# Altium PCB KC_Input_VAS_SP.PcbDoc
Units mil, origin at the board's own origin, x right, y up, seen from the top; angles counter-clockwise.
Board outline 4950 x 1900 mil, 2 copper layers (Top Layer, Bottom Layer); 71 components, 49 nets, 157 pads, 0 vias.
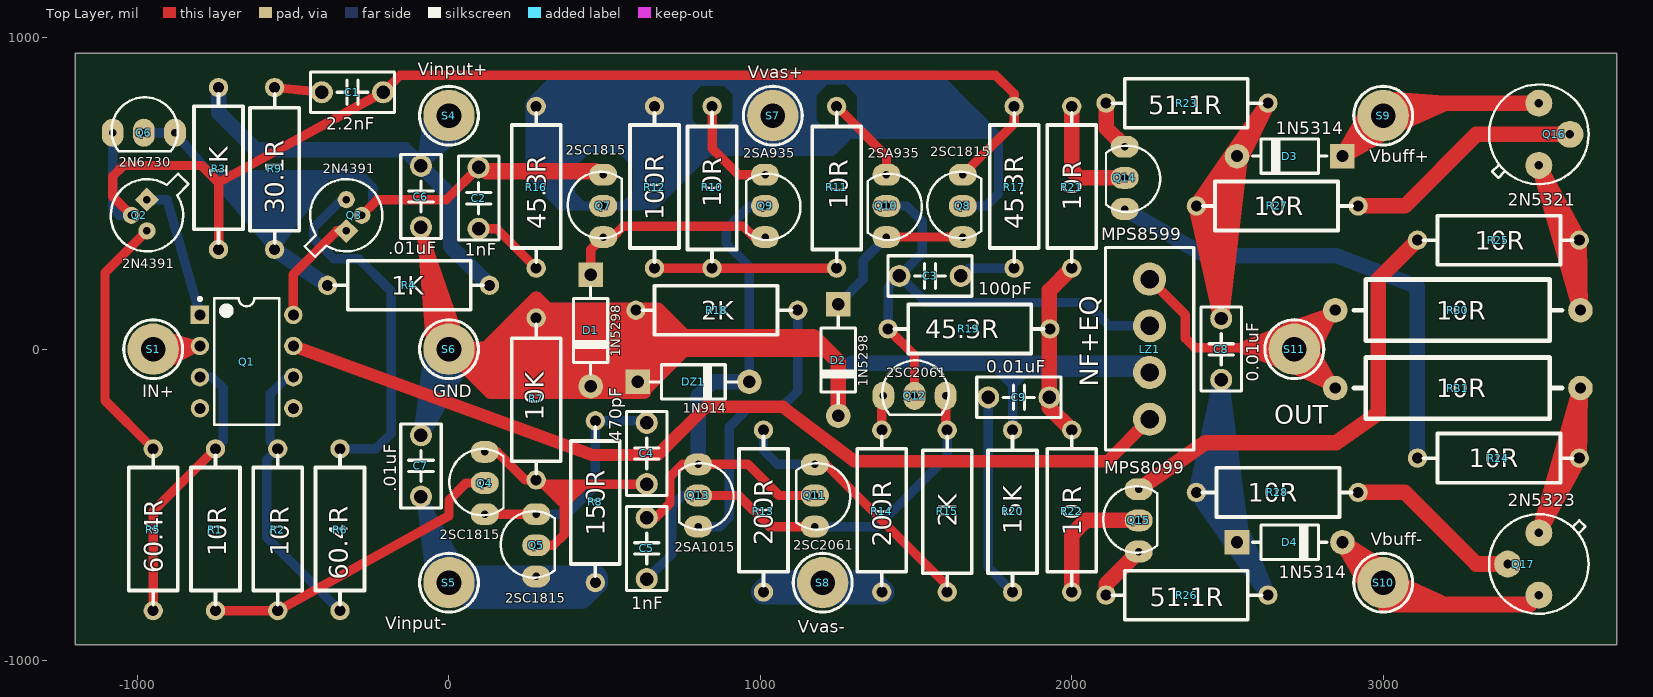
[diagram p0: Top Layer view]
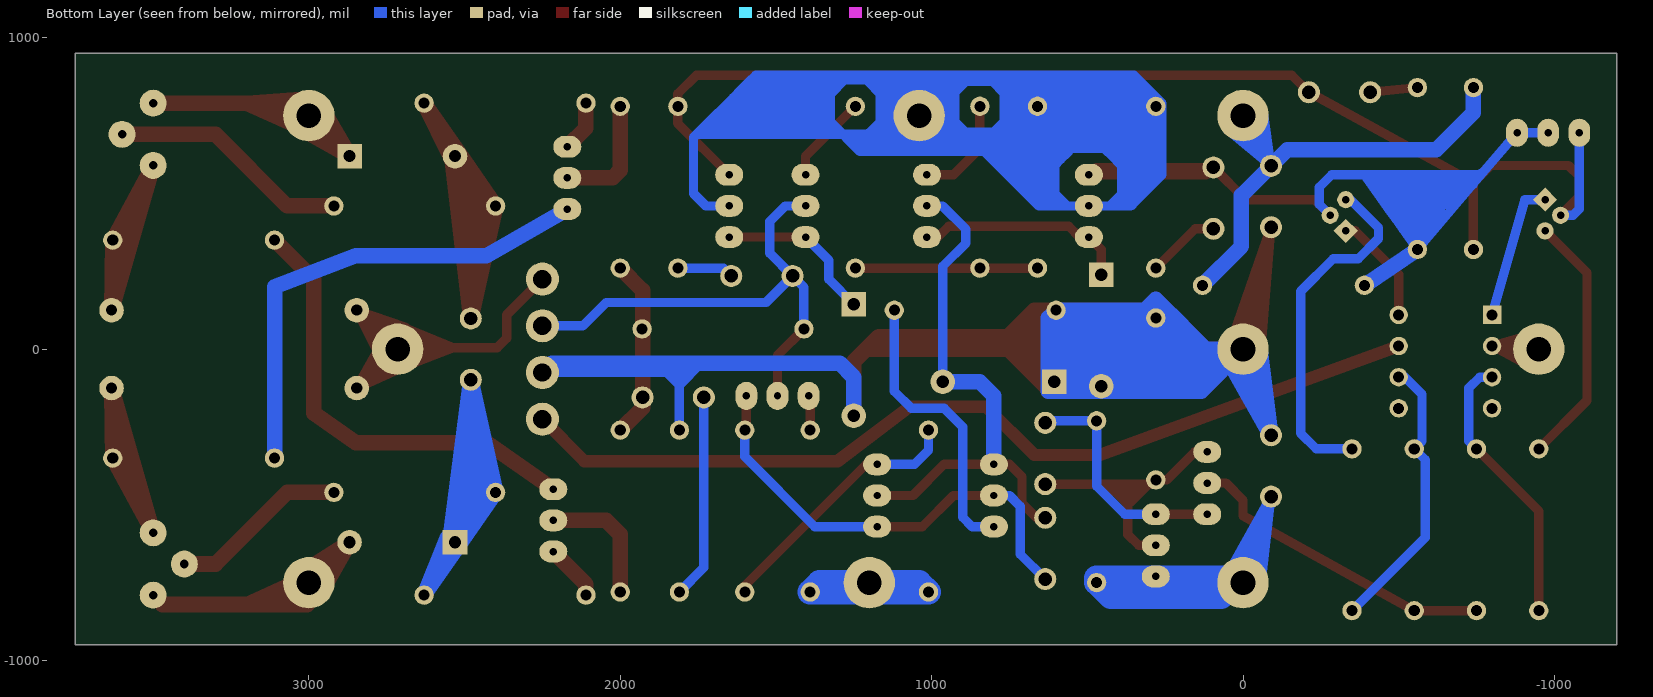
[diagram p1: Bottom Layer view, seen from below]
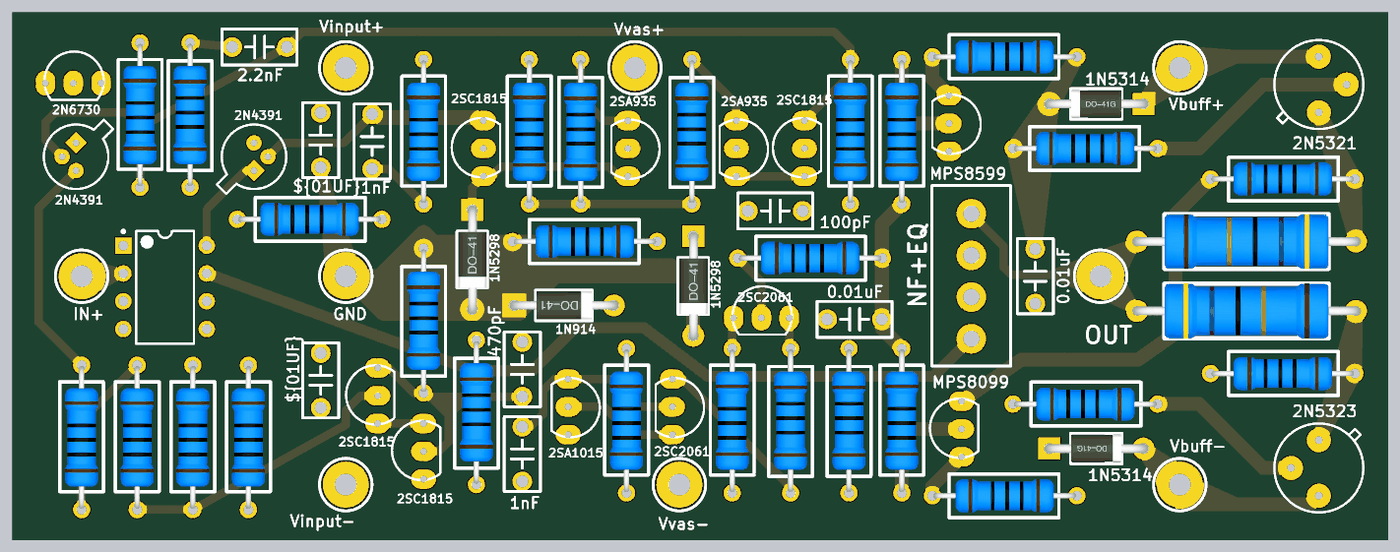
[diagram p2: 3D render of the assembled board from above, using the file's embedded part models]

## Layer stack, top to bottom
Top Solder: solder mask 0.4, Solder Resist, Dk 3.5
Top Layer: signal copper 1.4
Dielectric 1: dielectric 12.6, FR-4, Dk 4.8
Bottom Layer: signal copper 1.4
Bottom Solder: solder mask 0.4, Solder Resist, Dk 3.5

## Board outline
-1200,-950 -1200,950 3750,950 3750,-950

## Design rules (kind name [scope] priority, off if disabled: settings)
Clearance [All] p1: gap=10 ignorepadtopadclearanceinfootprint=FALSE except(0: Arc-Hole Track-Hole SMDPad-Hole THPad-Hole Via-Hole Fill-Hole Poly-Hole Region-Hole Text-Hole)
PolygonConnect [All] p1: connectstyle=Relief reliefconductorwidth=10 reliefentries=4 polygonreliefangle="90 Angle" airgapwidth=10
RoomDefinition KC_Input_VAS_Schematic [InComponentClass('KC_Input_VAS_Schematic')] p1: confinementstyle=ConfineIn formatcopy=TRUE lockcomponents=FALSE outline 2930,-2120 14045,-2120 14045,-1250 2930,-1250
RoutingVias [All] p1: holewidth=28 width=50 viastyle="Through Hole" minholewidth=28 minwidth=50 maxholewidth=28 maxwidth=50
SolderMaskExpansion [All] p1: expansion=4
Width [All] p1: maxlimit=200 minlimit=10 preferedwidth=50
30 further rules are at their usual default settings.

## Components (designator, comment, footprint, x,y, rotation, side; value= is the part's Value field where it differs from the comment)
C1 "2.2nF" "CBB 6.3*6.3*5" -310,825 r180 top
C2 "1nF" "CBB 6.3*6.3*5" 95,485 r90 top
C3 "100pF" "CBB 6.3*6.3*5" 1545,235 r0 top
C4 "470pF" "CBB 6.3*6.3*5" 635,-335 r90 top
C5 "1nF" "CBB 6.3*6.3*5" 635,-640 r270 top
C6 ".01uF" "CBB 6.3*6.3*5" -90,490 r270 top
C7 ".01uF" "CBB 6.3*6.3*5" -90,-375 r270 top
C8 "0.01uF" "CBB 6.3*6.3*5" 2480,0 r90 top
C9 "0.01uF" "CBB 6.3*6.3*5" 1830,-155 r180 top
D1 "1N5298" DO-41 455,60 r270 top
D2 "1N5298" DO-41 1250,-35 r270 top
D3 "1N5314" DO-41G 2700,620 r180 top
D4 "1N5314" DO-41G 2700,-620 r0 top
DZ1 "1N914" DO-41 785,-105 r0 top
LZ1 "NF+EQ" LZ12-3.81 2250,-225 r90 top
Q1 "MAT-02" DIP-8 -650,-40 r0 top
Q2 "2N4391" TO-18_SMALLHOLE -970,430 r270 top
Q3 "2N4391" TO-18_SMALLHOLE -330,430 r90 top
Q4 "2SC1815" TO92A_SmallHole 115,-530 r180 top
Q5 "2SC1815" TO92A_SmallHole 280,-730 r180 top
Q6 "2N6730" TO92A_SmallHole -1080,695 r90 top
Q7 "2SC1815" TO92A_SmallHole 495,360 r180 top
Q8 "2SC1815" TO92A_SmallHole 1650,360 r180 top
Q9 "2SA935" TO92A_SmallHole 1015,560 r0 top
Q10 "2SA935" TO92A_SmallHole 1405,560 r0 top
Q11 "2SC2061" TO92A_SmallHole 1175,-370 r0 top
Q12 "2SC2061" TO92A_SmallHole 1395,-150 r90 top
Q13 "2SA1015" TO92A_SmallHole 800,-370 r0 top
Q14 "MPS8599" TO92A_SmallHole 2170,650 r0 top
Q15 "MPS8099" TO92A_SmallHole 2215,-650 r180 top
Q16 "2N5321" TO39_SMALLHOLE 3500,590 r270 top
Q17 "2N5323" TO39_SMALLHOLE 3500,-590 r90 top
R1 "10R" "RS 1/2W-L" -750,-580 r90 top
R2 "10R" "RS 1/2W-L" -550,-580 r90 top
R3 "1K" "RS 1/2W-L" -740,580 r90 top
R4 "1K" "RS 1/2W-L" -130,205 r0 top
R5 "60.4R" "RS 1/2W-L" -950,-580 r90 top
R6 "60.4R" "RS 1/2W-L" -350,-580 r90 top
R7 "10K" "RS 1/2W-L" 280,-160 r270 top
R8 "150R" "RS 1/2W-L" 470,-490 r270 top
R9 "30.1R" "RS 1/2W-L" -560,580.16 r270 top
R10 "10R" "RS 1/2W-L" 845,520.16 r270 top
R11 "10R" "RS 1/2W-L" 1245,520 r270 top
R12 "100R" "RS 1/2W-L" 660,520.16 r90 top
R13 "200R" "RS 1/2W-L" 1010,-520 r90 top
R14 "200R" "RS 1/2W-L" 1390,-520 r90 top
R15 "2K" "RS 1/2W-L" 1600,-520 r270 top
R16 "45.3R" "RS 1/2W-L" 280,520 r90 top
R17 "45.3R" "RS 1/2W-L" 1815,520 r90 top
R18 "2K" "RS 1/2W-L" 860,125 r180 top
R19 "45.3R" "RS 1/2W-L" 1670,65 r0 top
R20 "15K" "RS 1/2W-L" 1810,-520 r270 top
R21 "10R" "RS 1/2W-L" 2000,520 r90 top
R22 "10R" "RS 1/2W-L" 2000,-520 r90 top
R23 "51.1R" "RS 1/2W-L" 2370,790 r180 top
R24 "10R" "RS 1/2W-L" 3370,-350 r0 top
R25 "10R" "RS 1/2W-L" 3370,350 r0 top
R26 "51.1R" "RS 1/2W-L" 2370,-790 r180 top
R27 "10R" "RS 1/2W-L" 2660,460 r180 top
R28 "10R" "RS 1/2W-L" 2660,-460 r0 top
R30 "10R" "RS 2W" 3240,125 r180 top
R31 "10R" "RS 2W" 3240,-125 r0 top
S1 "IN+" Screw-M2-s -950,0 r0 top
S4 "Vinput+" Screw-M2-s 0,750 r0 top
S5 "Vinput-" Screw-M2-s 0,-750 r0 top
S6 "GND" Screw-M2-s 0,0 r0 top
S7 "Vvas+" Screw-M2-s 1040,750 r0 top
S8 "Vvas-" Screw-M2-s 1200,-750 r0 top
S9 "Vbuff+" Screw-M2-s 3000,750 r0 top
S10 "Vbuff-" Screw-M2-s 3000,-750 r0 top
S11 "OUT" Screw-M2-s 2715,0 r0 top

## Footprints (in the part's own frame and the unit in brackets; to place one, negate y for a bottom-side part, rotate by r counter-clockwise, add the part's x,y. Pads: shape width x height; smd on the part's side, far side on the other; paste and mask are expansions set on the pad)
"CBB 6.3*6.3*5" [mm] "脚距5mm高6.3mm厚3mm"
  round 1.8 hole 1.1: 1(-2.5,0) 2(2.5,0)
  silkscreen extent -3.43,-1.65 3.43,1.65, body extent -3.15,-1.5 3.15,1.5, height 6.8
DIP-8 [mm] "DIP; 8 Leads; Row Spacing 7.62 mm; Pitch 2.54 mm"
  rect 1.5x1.5 hole 0.9: 1(-3.81,3.81)
  round 1.5 hole 0.9: 2(-3.81,1.27) 3(-3.81,-1.27) 4(-3.81,-3.81) 5(3.81,-3.81) 6(3.81,-1.27) 7(3.81,1.27) 8(3.81,3.81)
  silkscreen extent -3.93,-5.15 2.65,5.23, body extent -3.6,-5.15 3.6,5.15, height 5.08
DO-41 [mm] "2.6*9.1mm(直径，脚距）"
  rect 2x2 hole 1: 1(-4.55,0)
  round 2 hole 1: 2(4.55,0)
  silkscreen extent -3.56,-1.4 3.56,1.4, body extent -4.92,-1.29 4.98,1.31, height 2.65
DO-41G [mm] "2.5*8.6mm(直径，脚距）"
  rect 2x2 hole 1: 1(-4.3,0)
  round 2 hole 1: 2(4.3,0)
  silkscreen extent -3.05,-1.4 3.05,1.4, body extent -4.7,-1.25 4.7,1.25, height 2.55
LZ12-3.81 [mm] "Double Pole Switch 6 Pin"
  round 2.7 hole 1.5: 1(0,0) 2(3.81,0) 3(7.62,0) 4(11.43,0)
  silkscreen extent -2.5,-3.6 14,3.6
"RS 1/2W-L" [mil] "直插色环电阻，脚距12.5mm，直径3mm"
  round 62 hole 35.43: 1(-259.84,0) 2(259.84,0)
  silkscreen extent -240,-79 239,79, body extent -256,-59 256,59, height 122
"RS 2W" [mm] "直插色环电阻，脚距20mm，直径5mm"
  round 2 hole 0.9: 1(10,0) 2(-10,0)
  silkscreen extent -8.5,-2.5 8.5,2.5, body extent -10.4,-2.51 10.4,2.51, height 5.11
Screw-M2-s [mm]
  round 4.2 hole 2: 1(0,0)
  silkscreen extent -2.4,-2.4 2.4,2.4
TO39_SMALLHOLE [mm]
  round 2.2 hole 0.7: 1(0,0) 2(-2.54,2.54) 3(-5.08,0)
  silkscreen extent -6.6,-4.06 1.52,4.06
TO92A_SmallHole [mil]
  oval 90x70 hole 24.02: 1(0,0) 2(0,-100) 3(0,-200)
  silkscreen extent -60,-209 114,4
TO-18_SMALLHOLE [mm] "Can; 3 Leads; Pin Circle Dia. 2.54 mm; Lead Dia. 0.48 mm (max)"
  rect 1.4x1.4 hole 0.61 rot 45: 1(-1.27,0)
  round 1.4 hole 0.61: 2(0,-1.27) 3(1.27,0)
  silkscreen extent -3.39,-2.95 2.95,3.39

## Part data
C1 C2 C3 C4 C5 C6 C7 C8 C9: library part C-CBB, "CBB电容", BOM名称=CBB电容, 学习资源=www.ooocke.com, 版权归属=源创客
D1 D2 D3 D4: library part 1N5xxx, "Current Regulator Diodes"
DZ1: library part 1N4619, "3V/0.5W稳压管", BOM名称=3V/0.5W稳压管, 学习资源=www.ooocke.com, 版权归属=源创客
LZ1: library part KCNFEQ_LZ1, "King Cello Negative Feedback and EQ Board"
Q1: "孪生对管-NPN型 40V/20ma"
Q2 Q3: "N沟道JFET开关管 40V/150ma"
Q4 Q5 Q7 Q8: "音频放大-NPN型"
Q6: library part 2N6728/6729/6730, "中功率放大-PNP型"
Q9 Q10: "音频功放-PNP型 50V/500ma"
Q11 Q12: "音频放大-NPN型 50V/500ma"
Q13: "音频放大-PNP型"
Q14: library part MPS8598/8599, "音频放大-PNP型"
Q15: library part MPS8098/8099, "音频放大-NPN型"
Q16: library part 2N5320/5321, "中功率放大-NPN型 100V/1.2a"
Q17: library part 2N5322/5323, "中功率放大-PNP型 100V/1.2a"
R1 R2 R3 R4 R5 R6 R7 R8 R9 R10 R11 R12 R13 R14 R15 R16 R17 R18 R19 R20 R21 R22 R23 R24 R25 R26 R27 R28 R30 R31: library part R-CRR, "直插色环电阻", BOM名称=色环电阻, 学习资源=www.ooocke.com, 版权归属=源创客
S1 S4 S5 S6 S7 S8 S9 S10 S11: library part ScrewConnector, "Screw Connector"

## Nets (pads, with @x,y where several pads share a name; then routed paths per layer and width w, separated by ;. In a path a pad name is that pad's centre, name@x,y a point inside that pad or via, vN(x,y) a via of type N, cw(c..) or ccw(c..) an arc to the next point about the centre after c; other vN are vias at no path point)
GND: C6.2 C7.1 D1.2 D2.2 DZ1.1 LZ1.2 R7.1 R18.2 R20.1 S6.1 | length 15569.2
  Top Layer w30: S6.1@-60,35 C6.2 ; S6.1@-40,55 C6.2 ; S6.1 C6.2 ; S6.1@0,70 C6.2 ; S6.1@30,45 C6.2
  Top Layer w50: 215,-5 220,0 ; 590,-65 595,-65 625,-35 ; DZ1.1@595,-85 145,-85 112.5,-52.5 ; DZ1.1 DZ1.1@625,-85.87 ; 750,45 670,125 665,125 ; D2.2 1250,-40 1210,0 ; S6.1@60,0 112.5,-52.5 ; S6.1@60,0 120.16,0 280,159.84 ; S6.1@60,0 S6.1 135,-135 625,-135 DZ1.1@625,-130 ; 112.5,-52.5 135,-30 ; 135,-30 R7.1@255,90 ; 135,-30 140,-35 625,-35 ; 220,0 260,40 625,40 ; 220,0 625,0 ; R7.1@255,90 614.84,90 625,100.16 ; R7.1@255,90 280,115 280,159.84 ; 280,159.84 314.84,125 R18.2 ; R18.2 R18.2@625,125 ; R18.2 625,100.16 ; DZ1.1@625,-130 DZ1.1@625,-85.87 ; DZ1.1@625,-130 755,0 ; DZ1.1@625,-85.87 625,-35 ; DZ1.1@625,-85.87 710,-0.87 710,0 ; 625,-35 625,0 ; 625,0 710,0 ; 625,0 625,40 ; 625,40 625,100.16 ; 625,40 710,40 ; R18.2@625,125 710,40 ; R18.2@625,125 665,125 ; 665,125 750,40 ; 710,0 755,0 ; 710,0 710,40 ; 710,40 750,40 ; 750,40 1170,40 1210,0 ; 755,0 1210,0
  Bottom Layer w30: 1740,-45 1810,-115 ; 1780,-65 1790,-75 1850,-75 ; R20.1@1810,-265.16 R20.1 1810,-115 ; LZ1.2@2220,-45 LZ1.2 ; LZ1.2@2240,-85 LZ1.2 ; 1810,-115 1840,-85 ; 1810,-115 1810,-95 1820,-85 1840,-85 ; 1840,-85 1850,-75 ; 1850,-75 LZ1.2
  Bottom Layer w50: S6.1@-55,-5 C7.1 ; S6.1@40,-50 C7.1 ; DZ1.1@620,-135 135,-135 S6.1 ; DZ1.1@625,-135 625,100.16 R18.2 314.84,125 280,159.84 250.08,129.92 ; D2.2 1250,-90 1295,-45 1740,-45 LZ1.2@2220,-45 ; C7.1 S6.1 ; S6.1 S6.1@55,0 ; S6.1@55,0 120.16,0 ; S6.1@55,0 100,-45 ; 100,-45 145,-90 565,-90 580,-75 580,-35 ; 100,-45 570,-45 580,-35 ; 120.16,0 167.58,47.42 ; 120.16,0 545,0 545,25 ; 167.58,47.42 217.58,97.42 ; 167.58,47.42 207.42,47.42 ; 207.42,47.42 229.84,25 545,25 ; 207.42,47.42 215,55 545,55 545,25 ; 217.58,97.42 250.08,129.92 ; 217.58,97.42 R7.1@282.58,97.42 ; 250.08,129.92 R7.1@282.58,97.42 ; R7.1@282.58,97.42 295,85 580,85 580,25 ; 545,25 580,25 ; 580,-35 580,25
NetC1_1: C1.1 Q2.2 Q6.1 Q8.3 R3.1 R17.2 | length 4060.6
  Top Layer w30: Q2.2 -1080,490 -1080,555 -1045,590 -795,590 -740,535 ; R3.1 -740,535 ; Q8.3 1815,725 R17.2 1815,820 1755,880 -156.57,880 C1.1 -740,535
  Bottom Layer w30: Q6.1 -1080,450 -1060,430 Q2.2
NetC1_2: C1.2 R9.1 | length 152.3
  Top Layer w30: R9.1 C1.2
NetC2_1: C2.1 R16.1 | length 237.4
  Top Layer w30: C2.1 153.58,386.57 R16.1
NetC2_2: C2.2 Q3.2 Q6.2 Q6.3 Q7.3 R4.1 R9.2 | length 4611.6
  Top Layer w30: Q3.2 -230,480 -8.43,480 C2.2 ; C2.2 471.57,583.43 Q7.3 118.43,560 C2.2
  Bottom Layer w30: Q6.2 Q6.3 -739.08,530 ; -765,565 -760,560 -390,560 ; -695,500 -680,500 ; -420,535 -425,530 -710,530 ; Q3.2 -245,465 -245,520 -285,560 -390,560 ; -739.08,530 -710,530 ; -739.08,530 R9.2 ; -710,530 -680,500 ; -680,500 -651.38,471.38 ; -680,500 -432.56,500 ; -651.38,471.38 -640,460 ; -651.38,471.38 -452.85,471.38 ; -640,460 -560,360 ; -640,460 -622.5,442.5 ; -622.5,442.5 -595,415 ; -622.5,442.5 -618.29,446.71 -470.36,446.71 ; -595,415 -566.52,386.52 ; -595,415 -591.72,418.28 -544.8,418.28 ; -566.52,386.52 ccw(c-566.52,408.24) -544.8,408.24 -544.8,418.28 ; -566.52,386.52 -540,386.52 ; -566.52,386.52 -560,380 -560,360 ; R9.2 -560,360 ; R9.2 -513.04,386.52 ; -560,360 cw(c-544.26,360) -555.39,371.13 -540,386.52 ; -544.8,418.28 -490.52,418.28 ; -544.8,418.28 -513.04,386.52 ; -540,386.52 -513.04,386.52 ; -513.04,386.52 -490.52,418.28 ; -490.52,418.28 -470.36,446.71 ; -470.36,446.71 -452.85,471.38 ; -452.85,471.38 -432.56,500 ; -432.56,500 -390,560
  Bottom Layer w50: R9.2 R4.1
NetC3_1: C3.1 LZ1.3 Q10.2 Q12.2 R19.1 | length 1646.1
  Top Layer w30: R19.1 1495,-19.84 Q12.2
  Bottom Layer w30: Q10.2 1470,460 1520,410 1520,308.43 C3.1 ; R19.1 1410.16,198.58 C3.1 ; LZ1.3 2120,75 2045,150 1531.57,150 C3.1
NetC3_2: C3.2 R17.1 | length 182
  Bottom Layer w30: C3.2 1668.58,260.16 R17.1
NetC4_1: C4.1 Q4.3 Q5.2 R7.2 | length 1176.3
  Top Layer w30: Q4.3 155,-330 244.84,-419.84 R7.2 ; Q5.2 335,-630 370,-595 370,-500 ; C4.1 435,-433.43 ; R7.2 289.84,-419.84 R7.2@303.43,-433.43 ; R7.2 293.58,-433.43 R7.2@303.43,-433.43 ; R7.2@303.43,-433.43 360,-490 ; R7.2@303.43,-433.43 340,-433.43 ; 340,-433.43 375,-433.43 ; 340,-433.43 360,-453.43 360,-455 ; 360,-490 360,-455 ; 360,-490 370,-490 ; 360,-490 370,-500 ; 360,-455 370,-455 ; 370,-500 370,-490 ; 370,-490 370,-455 ; 370,-490 378.43,-490 435,-433.43 ; 370,-455 370,-438.43 375,-433.43 ; 370,-455 383.43,-455 405,-433.43 ; 375,-433.43 405,-433.43 ; 405,-433.43 435,-433.43
  Bottom Layer w30: C4.1@631.57,-430 C4.1
NetC4_2: C4.2 Q4.1 Q5.3 R8.1 | length 769.8
  Top Layer w30: Q4.1 Q5.3
  Bottom Layer w30: Q5.3 380,-530 470,-440 R8.1 628.58,-230.16 C4.2
NetC5_1: C5.1 DZ1.2 Q9.2 Q11.2 Q13.1 | length 1746.8
  Top Layer w30: C5.1 663.43,-541.57 710,-495 710,-410 750,-370 Q13.1 960,-370 1060,-470 Q11.2
  Bottom Layer w30: DZ1.2 964.13,265.87 890,340 890,385 965,460 Q9.2
  Bottom Layer w50: Q13.1@800,-335 800,-150 845,-105 DZ1.2
NetC5_2: C5.2 Q11.3 Q12.3 Q13.2 R15.1 | length 1497.8
  Top Layer w30: Q13.2 930,-470 1030,-570 Q11.3 ; Q12.3 1595,-255.16 R15.1
  Bottom Layer w30: C5.2 715,-658.43 715,-505 750,-470 Q13.2 ; Q11.3 1375,-570 1600,-345 R15.1
NetC6_1: C6.1 R3.2 R4.2 S4.1 | length 2077.1
  Bottom Layer w30: S4.1@-65,765 -65.8,759.32 C6.1 ; S4.1@-55,715 C6.1 ; S4.1@-5,680 C6.1 ; S4.1 C6.1 ; S4.1@50,705 42.6,698.84 C6.1
  Bottom Layer w50: R3.2 -740,760 -620,640 -141.57,640 C6.1 5,493.43 5,329.84 R4.2
NetC7_2: C7.2 Q5.1 R8.2 S5.1 | length 2804.7
  Bottom Layer w30: S5.1@-60,-730 C7.2 ; S5.1@-45,-695 C7.2 ; S5.1@10,-695 C7.2 ; S5.1@40,-710 15,-735 S5.1 C7.2 ; S5.1@40,-705 C7.2
  Bottom Layer w80: S5.1@15,-735 470,-735 R8.2 R8.2@469.84,-750 ; S5.1@29.84,-779.84 S5.1 S5.1@25,-750 ; S5.1@25,-750 R8.2@469.84,-750 ; S5.1@25,-750 70,-795 424.84,-795 R8.2@469.84,-750
NetC8_1: C8.1 D4.1 R26.1 R28.1 | length 2917.5
  Bottom Layer w50: 2440,-475 2441.13,-464.35 C8.1 ; 2470,-500 C8.1 ; 2505,-550 C8.1 ; D4.1@2545,-595 C8.1 ; R28.1 2517.78,-629 R26.1 2556.8,-609.45 2555,-605 2549.54,-599.89 R28.1 ; R28.1 C8.1
NetC8_2: C8.2 D3.2 R23.1 R27.2 | length 2578.1
  Top Layer w50: 2420,415 2434.33,441.54 2500.48,564.02 ; 2440,345 2518.36,582.56 ; 2465,260 D3.2@2525.16,589.62 ; R27.2 2517.78,629 R23.1 2544.12,613.49 D3.2@2540,605 ; R27.2 2500.48,564.02 ; R27.2 C8.2 D3.2@2540,605 ; 2500.48,564.02 2518.36,582.56 ; 2500.48,564.02 D3.2 ; 2518.36,582.56 D3.2@2525.16,589.62 ; 2518.36,582.56 D3.2 ; D3.2@2525.16,589.62 D3.2@2540,605 ; D3.2@2525.16,589.62 D3.2
NetC9_1: C9.1 R19.2 R21.1 R22.2 | length 581.6
  Top Layer w30: R19.2@1928.43,63.58 R19.2
  Top Layer w50: R22.2 1928.43,-188.58 C9.1 1928.43,63.58 1928.43,188.58 R21.1
NetC9_2: C9.2 R20.2 | length 672.3
  Top Layer w30: C9.2 C9.2@1731.57,-140
  Bottom Layer w30: C9.2 1731.57,-701.42 R20.2
NetD1_1: D1.1 Q7.1 Q9.3 | length 686.4
  Top Layer w30: D1.1 455,320 Q7.1 525,360 560,395 945,395 980,360 Q9.3
NetD2_1: D2.1 Q8.1 Q10.3 | length 525.1
  Top Layer w30: Q10.3 Q8.1
  Bottom Layer w30: D2.1 1330,224.13 1330,285 Q10.3
NetD3_2: D3.1 Q16.3 S9.1 | length 1559.6
  Top Layer w50: S9.1@2955,770 D3.1 ; S9.1@3000,805 3004.1,804.69 3200,790 ; S9.1@3020,705 D3.1 ; S9.1@3045,720 3200,790 ; S9.1@3060,765 3200,790 ; Q16.3 3200,790 ; D3.1 S9.1 3040,790 3200,790
NetD4_1: D4.2 Q17.3 S10.1 | length 1435.3
  Top Layer w50: S10.1@2960,-780 2956.86,-774.46 D4.2 ; S10.1@3005,-820 3070,-820 ; S10.1@3010,-710 D4.2 ; S10.1@3055,-755 3200,-820 ; S10.1@3070,-785 3200,-820 ; Q17.3 3470,-820 3200,-820 ; D4.2 S10.1 3070,-820 ; 3070,-820 3200,-820
NetLZ1_1: LZ1.1 Q1.7 | length 2990.9
  Top Layer w40: Q1.7 460,-340 670,-340 825,-185 1072,-185 1302,-360 2115,-360 LZ1.1
NetLZ1_4: LZ1.4 R30.1 R31.2 S11.1 | length 2710.1
  Top Layer w30: LZ1.4 2365,110 2365,35 2395,5 2535,5 ; S11.1@2655,-15 2535,5 ; S11.1@2655,30 2535,5 ; S11.1@2690,70 2690.33,70.11 2691.89,70.67 R30.1 ; S11.1@2695,70 2689.5,67.77 2687.76,67.06 2535,5 ; S11.1@2735,55 R30.1 ; S11.1@2740,-60 R31.2 ; S11.1@2770,5 S11.1@2779.41,-11.03 ; S11.1@2770,30 R30.1 ; S11.1@2775,-20 S11.1@2779.41,-11.03 ; S11.1@2780,-5 S11.1@2781.26,-7.28 ; 2535,5 2690,-55 2690.3,-55.14 R31.2 ; 2535,5 S11.1@2715,5 ; S11.1@2715,5 R30.1 ; S11.1@2715,5 2717.5,2.52 R31.2 ; S11.1@2779.41,-11.03 S11.1@2781.26,-7.28 ; S11.1@2779.41,-11.03 R31.2 ; S11.1@2781.26,-7.28 R30.1 ; S11.1@2781.26,-7.28 R31.2
NetQ1_1: Q1.1 Q2.1 | length 449.6
  Bottom Layer w30: Q2.1 -905,480 Q1.1
NetQ1_2: Q1.2 S1.1 | length 366.9
  Top Layer w30: S1.1 Q1.2 ; S1.1@-905,40 Q1.2 ; S1.1@-895,-40 Q1.2
NetQ1_3: Q1.3 R1.2 R5.1 | length 897.5
  Top Layer w30: R5.1 -950,-520.16 R1.2
  Bottom Layer w30: Q1.3 -760,-90 -725,-125 -725,-295.16 R1.2
NetQ1_5: Q1.6 R2.2 R6.1 | length 915
  Bottom Layer w30: Q1.6 -520.32,-90 -575,-144.68 -575,-295.16 R2.2 -585,-355.16 -585,-604.84 R6.1
NetQ1_7: Q1.8 Q3.1 | length 358
  Top Layer w30: Q1.8 -500,240 -360,380 Q3.1
NetQ2_2: Q2.3 R5.2 | length 820.3
  Top Layer w30: Q2.3 -1105,245 -1105,-165.16 R5.2
NetQ3_2: Q3.3 R6.2 | length 1138.5
  Bottom Layer w30: R6.2 -235.16,-320.16 -185,-270 -185,185 -290,290 -370,290 -435,355 -435,390 -345,480 Q3.3
NetQ4_2: Q4.2 R1.1 R2.1 | length 1016.6
  Top Layer w30: R1.1 R2.1 0,-535 0,-485 55,-430 Q4.2
NetQ7_2: Q7.2 Q8.2 R12.2 R16.2 S7.1 | length 19901.8
  Bottom Layer w30: 310,540 310,627.5 ; 400,470 395,470 370,495 ; 775,635 770,635 ; 810,870 810,865 ; 950,675 952.5,677.5 952.5,797.5 ; S7.1@975,725 970,720 970,680 ; S7.1@975,775 952.5,797.5 ; S7.1@1080,695 1125,695 ; 1125,810 1125,800 ; 1135,855 935,855 ; 1205,880 1204.84,879.84 ; 1215,875 1215,870 1210,865 ; 1315,860 1310,865 1279.84,865 ; Q8.2 1725,460 1765,500 1765,680 1750,695 ; 280,540 260,560 260,790 349.84,879.84 380,879.84 ; 280,540 327.5,492.5 ; 280,540 280,650 ; 280,650 280,675 ; 280,650 287.5,657.5 310,657.5 ; 280,675 280,705 ; 280,675 760,675 ; 280,705 280,722.5 ; 280,705 730,705 ; 280,722.5 280,740 ; 280,722.5 730,722.5 ; 280,740 730,740 ; 280,740 R16.2 ; R16.2 299.84,760 730,760 ; R16.2 R16.2@280.16,780 ; R16.2 659.84,779.84 R12.2 ; R16.2@280.16,780 310.16,810 ; R16.2@280.16,780 R12.2 ; 310,627.5 327.5,645 ; 310,627.5 310,657.5 ; 310,657.5 340,657.5 ; 310.16,810 730,810 ; 310.16,810 340.08,839.92 ; 327.5,492.5 345,475 ; 327.5,492.5 327.5,645 ; 327.5,645 340,657.5 ; 340,657.5 370,657.5 ; 340,657.5 345,652.5 345,475 ; 340.08,839.92 341.25,838.75 ; 340.08,839.92 355.16,855 ; 341.25,838.75 357.5,822.5 742.5,822.5 ; 341.25,838.75 758.75,838.75 ; 345,475 360,460 385,460 ; 355.16,855 380,879.84 ; 355.16,855 775,855 ; 370,495 370,625 ; 370,495 370,475 385,460 ; 370,625 370,657.5 ; 370,625 390,625 ; 370,657.5 390,657.5 ; 380,879.84 799.84,879.84 ; 385,460 427.5,460 ; 390,590 425,625 ; 390,590 390,625 ; 390,590 390,497.5 427.5,460 ; 390,625 425,625 ; 390,625 390,657.5 ; 390,657.5 412.5,635 435,635 ; 390,657.5 777.5,657.5 ; 425,625 435,635 ; 427.5,460 Q7.2 565,460 ; 435,635 445,645 550,645 565,630 ; 565,460 595,460 ; 565,460 605,500 ; 565,630 585,610 ; 565,630 570,635 770,635 ; 585,610 630,610 ; 585,610 605,590 605,500 ; 595,460 740,605 ; 595,460 630,460 ; 605,500 625,520 ; 625,520 625,555 ; 625,520 685,580 ; 625,555 625,580 ; 625,555 650,580 ; 625,580 650,580 ; 625,580 625,605 ; 625,605 665,605 687.5,582.5 ; 625,605 630,610 ; 630,460 655,460 830,635 ; 630,460 630,465 800,635 ; 630,610 715,610 ; 650,580 685,580 ; R12.2 665,785 730,785 ; 685,580 687.5,582.5 ; 687.5,582.5 715,610 ; 715,610 735,610 740,605 ; 730,705 730,722.5 ; 730,705 745,690 ; 730,722.5 730,740 ; 730,722.5 746.25,722.5 748.75,720 ; 730,740 730,760 ; 730,740 748.75,740 ; 730,760 730,785 ; 730,785 748.75,803.75 ; 730,785 730,810 ; 730,810 742.5,822.5 ; 740,605 770,635 ; 742.5,822.5 758.75,838.75 ; 742.5,822.5 767.5,822.5 ; 745,690 760,675 ; 745,690 748.75,693.75 748.75,720 ; 748.75,720 748.75,740 ; 748.75,740 748.75,803.75 ; 748.75,803.75 767.5,822.5 ; 758.75,838.75 775,855 ; 760,675 767.5,667.5 ; 767.5,667.5 777.5,657.5 ; 767.5,667.5 767.5,690 ; 767.5,690 775,690 ; 767.5,690 767.5,730 ; 767.5,730 800,697.5 ; 767.5,730 767.5,822.5 ; 767.5,822.5 805,860 ; 775,690 790,690 837.5,642.5 ; 775,690 830,635 ; 775,855 780,860 ; 777.5,657.5 800,635 ; 780,860 799.84,879.84 ; 780,860 805,860 ; 799.84,879.84 824.84,879.84 ; 800,635 830,635 ; 800,697.5 813.75,683.75 ; 800,697.5 892.5,697.5 ; 805,860 810,865 ; 805,860 890,860 ; 810,865 824.84,879.84 ; 813.75,683.75 833.75,663.75 ; 813.75,683.75 878.75,683.75 ; 824.84,879.84 870.16,879.84 ; 830,635 837.5,642.5 ; 830,635 845,635 ; 833.75,663.75 845,652.5 845,650 ; 833.75,663.75 858.75,663.75 ; 837.5,642.5 845,650 ; 837.5,642.5 845,635 ; 845,635 925,635 ; 845,635 845,650 ; 845,650 858.75,663.75 ; 858.75,663.75 878.75,683.75 ; 858.75,663.75 921.25,663.75 925,660 ; 870.16,879.84 890,860 ; 870.16,879.84 910.16,879.84 ; 878.75,683.75 892.5,697.5 ; 878.75,683.75 921.25,683.75 925,680 ; 890,860 925,825 ; 890,860 915,860 922.5,867.5 ; 892.5,697.5 925,730 ; 910.16,879.84 922.5,867.5 ; 910.16,879.84 1155,879.84 ; 922.5,867.5 935,855 ; 925,635 1230,635 1247.5,652.5 ; 925,635 925,660 ; 925,635 960,670 ; 925,660 925,680 ; 925,680 925,730 ; 925,730 925,825 ; 925,825 952.5,797.5 ; 935,855 952.5,837.5 ; 952.5,797.5 952.5,837.5 ; 952.5,837.5 962.5,827.5 ; 960,670 1225,670 ; 960,670 977.5,652.5 1247.5,652.5 ; 960,670 970,680 ; 962.5,827.5 1112.5,827.5 1115,825 ; 962.5,827.5 S7.1 ; 970,680 S7.1 ; S7.1 1115,825 ; S7.1 1075,750 1125,800 ; 1115,825 1155,865 1155,879.84 ; 1125,695 1125,800 ; 1125,695 1150,695 ; 1125,800 1150,825 ; 1150,695 1200,695 ; 1150,695 1150,825 ; 1150,825 1160,835 ; 1155,879.84 1204.84,879.84 ; 1160,815 1165,810 1165,730 1200,695 ; 1160,815 1210,865 ; 1160,815 1160,835 ; 1160,835 1190,865 ; 1190,865 1204.84,879.84 ; 1190,865 1210,865 ; 1200,695 1205,690 ; 1204.84,879.84 1265,879.84 ; 1205,690 1225,670 ; 1205,690 1285,690 ; 1210,865 1279.84,865 ; 1225,670 1265,670 ; 1247.5,652.5 1265,670 ; 1265,670 1285,690 ; 1265,879.84 1320,879.84 ; 1265,879.84 1279.84,865 ; 1279.84,865 1325,819.84 ; 1285,690 1310,690 ; 1285,690 1325,730 1325,819.84 ; 1310,690 1330,690 ; 1310,690 1335,715 1355,715 ; 1320,879.84 1355,879.84 ; 1320,879.84 1325,874.84 1325,819.84 ; 1330,690 1375,690 ; 1330,690 1355,715 ; 1355,715 1355,879.84 ; 1355,879.84 1375,879.84 ; 1375,690 1400,690 ; 1375,690 1375,879.84 ; 1375,879.84 1400,879.84 ; 1400,690 1430,690 ; 1400,690 1400,879.84 ; 1400,879.84 1425,879.84 ; 1425,879.84 1450,879.84 ; 1425,879.84 1425,695 1430,690 ; 1430,690 1450,690 ; 1450,690 1450,720 ; 1450,690 1600,690 ; 1450,720 1450,745 ; 1450,720 1580,720 ; 1450,745 1450,770 ; 1450,745 1540,745 1547.5,752.5 ; 1450,770 1450,795 ; 1450,770 1455,775 1525,775 ; 1450,795 1505,795 ; 1450,795 1450,825 ; 1450,825 1450,845 ; 1450,825 1605,825 1607.5,827.5 ; 1450,845 1450,879.84 ; 1450,845 1460,855 1580,855 ; 1450,879.84 1565.16,879.84 1585,860 ; 1505,795 1525,775 ; 1505,795 1535,795 ; 1525,775 1547.5,752.5 ; 1535,795 1570,795 ; 1535,795 1640,690 ; 1547.5,752.5 1580,720 ; 1570,795 1600,795 ; 1570,795 1570,790 1670,690 ; 1580,720 1600,700 1600,690 ; 1580,855 1607.5,827.5 ; 1580,855 1585,860 ; 1585,860 1612.5,832.5 ; 1600,690 1640,690 ; 1600,795 1625,795 1632.5,802.5 ; 1600,795 1705,690 ; 1607.5,827.5 1612.5,832.5 ; 1607.5,827.5 1632.5,802.5 ; 1612.5,832.5 1637.5,807.5 ; 1632.5,802.5 1637.5,807.5 ; 1632.5,802.5 1717.5,717.5 1727.5,717.5 ; 1637.5,807.5 1727.5,717.5 ; 1640,690 1670,690 ; 1670,690 1705,690 ; 1705,690 1745,690 1750,695 ; 1727.5,717.5 1750,695
NetQ9_1: Q9.1 R10.1 | length 340.2
  Top Layer w30: R10.1 845,645 930,560 Q9.1
NetQ10_1: Q10.1 R11.1 | length 286.1
  Top Layer w30: R11.1 1405,619.84 Q10.1
NetQ11_1: Q11.1 R13.2 R15.2 | length 854.9
  Top Layer w30: Q11.1 1210,-370 1600,-760 R15.2
  Bottom Layer w30: R13.2 1010,-325 1055,-370 Q11.1
NetQ12_1: Q12.1 R14.2 | length 112.2
  Top Layer w30: R14.2 1390,-155 Q12.1
NetQ13_3: Q13.3 R18.1 | length 930
  Bottom Layer w30: Q13.3 870,-570 900,-540 900,-250 960,-190 1065,-190 1119.84,-135.16 R18.1
NetQ14_1: Q14.2 R21.2 | length 385.2
  Top Layer w50: R21.2 2000,575 2025,550 Q14.2
NetQ14_2: Q14.3 R24.1 | length 1553.8
  Bottom Layer w30: R24.1@3110.16,-355 R24.1
  Bottom Layer w50: Q14.3 2430,300 2850,300 3110.16,199.84 R24.1
NetQ14_3: Q14.1 R23.2 | length 164.8
  Top Layer w50: R23.2 2110.16,709.84 Q14.1
NetQ15_1: Q15.2 R22.1 | length 418.5
  Top Layer w50: R22.1 2000,-595 2045,-550 Q15.2
NetQ15_2: Q15.3 R25.1 | length 1469.1
  Top Layer w30: Q15.3 Q15.3@2215,-435
  Top Layer w50: Q15.3 2430,-300 2850,-300 2985,-205 2985,224.84 R25.1
NetQ15_3: Q15.1 R26.2 | length 183.4
  Top Layer w50: R26.2 2110.16,-754.84 Q15.1
NetQ16_1: Q16.1 R25.2 R30.2 | length 1374.6
  Top Layer w50: 3632.07,220 3590.66,336.01 Q16.1 ; Q16.1 R25.2 R30.2 Q16.1
NetQ16_3: Q16.2 R27.1 | length 775.4
  Top Layer w50: R27.1 3070,460 3300,690 Q16.2
NetQ17_1: Q17.1 R24.2 R31.1 | length 1341.5
  Top Layer w50: Q17.1 3598.98,-337.88 3631.47,-255.11 ; Q17.1 R24.2 3631.47,-255.11 ; Q17.1 R31.1 3631.47,-255.11
NetQ17_3: Q17.2 R28.2 | length 575.4
  Top Layer w50: R28.2 3070,-460 3300,-690 Q17.2
NetR10_2: R10.2 R11.2 R12.1 | length 585.3
  Top Layer w30: R12.1 R10.2 1244.84,260.32 R11.2
  Bottom Layer w30: R11.2@1244.84,260.32 R11.2
NetR13_1: R13.1 R14.1 S8.1 | length 784.7
  Bottom Layer w80: R13.1 R14.1 1360.16,-750 S8.1 1039.84,-750 R13.1
pads on no net: Q1.4 Q1.5

## Silkscreen, mask and mechanical layers (free items; w line width, h text height)
Drill Drawing:
  the board outline again, w10